# EAGLE board PCB(beta) (EAGLE 8.1.0), part 1 of 2

Size 160 x 100 mm. Coordinates in mm from the lower left corner, seen from the top.
Outline: 0,0 160,0 160,100 0,100 0,0
Copper layers (1*16): Top 0.035mm / dielectric 1.5mm / Bottom 0.035mm
Design rules "default": minimum track width 10mil, minimum drill 24mil, track to track 8mil, track to pad 8mil, pad to pad 8mil, via to via 8mil, smd to smd 8mil, copper to edge 40mil, drill to drill 8mil, minimum pad ring 10mil, minimum via ring 8mil, stop-mask expansion 4mil, vias tented up to drill 0mil, thermal gap 10mil

## Footprints (pad centres in the part's own frame; a part is rotated, then mirrored left to right if it is on the bottom)
0603 = smd 1.1 x 1: 1 -0.85,0; 2 0.85,0
0805 = smd 0.8 x 1.2: 1 -0.9,0; 2 0.9,0
EIA7343 = smd 2.55 x 2.7: A 3.17,0; C -3.17,0
NIC_10X10.5_CAP = smd 4.5 x 2.5: + 4.5,0; - -4.5,0
CPOL-RADIAL-2.5MM-6.5MM = drill 0.7 pad 1.651 square: 1 1.25,0 | drill 0.7 pad 1.651: 2 -1.25,0
NFM21C = smd 1.4 x 0.8: 1 -1.425,0; 3 1.425,0 | smd 0.6 x 1.1: 2@1 0,-0.85; 2@2 0,0.85
SMA-DIODE = smd 1.27 x 1.47: A -2.15,0; C 2.15,0
SOD-323 = smd 0.63 x 0.83: A 1.15,0; C -1.15,0
LED-0603 = smd 1 x 1: A -0.877,0; C 0.877,0
0435SERIES = smd 0.508 x 0.559: 1 -0.47,0; 2 0.47,0
4,1-PAD = drill 4.1 pad 8: B4,1 0,0
MLF32 = smd 0.7 x 0.3: 1 -2.35,1.75; 2 -2.35,1.25; 3 -2.35,0.75; 4 -2.35,0.25; 5 -2.35,-0.25; 6 -2.35,-0.75; 7 -2.35,-1.25; 8 -2.35,-1.75; 17 2.35,-1.75; 18 2.35,-1.25; 19 2.35,-0.75; 20 2.35,-0.25; 21 2.35,0.25; 22 2.35,0.75; 23 2.35,1.25; 24 2.35,1.75 | smd 0.3 x 0.7: 9 -1.75,-2.35; 10 -1.25,-2.35; 11 -0.75,-2.35; 12 -0.25,-2.35; 13 0.25,-2.35; 14 0.75,-2.35; 15 1.25,-2.35; 16 1.75,-2.35; 25 1.75,2.35; 26 1.25,2.35; 27 0.75,2.35; 28 0.25,2.35; 29 -0.25,2.35; 30 -0.75,2.35; 31 -1.25,2.35; 32 -1.75,2.35
POWER_JACK_SMD = smd 2.8 x 2.4: GND 0,-5.7; P$4 6.1,-5.7; VIN0 0,5.7; VIN1 6.1,5.7 | hole 2.032: 0,0; 4.572,0
1X03 = drill 1.016 pad 1.88: 1 0,0; 2 2.54,0; 3 5.08,0
USB-B-MICRO-SMD = smd 1.45 x 0.4: D+ 2.725,0; D- 2.725,0.65; GND 2.725,-1.3; ID 2.725,-0.65; VBUS 2.725,1.3 | smd 1.5 x 1.8: SHIELD1 0,3.685; SHIELD2 0,-3.685 | smd 1.5 x 2.5: SHIELD3 0,0 | hole 0.85: 2.2,1.9; 2.2,-1.9
2X3 = drill 1.016 pad 1.88: 1 0,0; 2 0,2.54; 3 2.54,0; 4 2.54,2.54; 5 5.08,0; 6 5.08,2.54
685119134923 = smd 0.28 x 2.6: 1 4.5,0; 2 4,0; 3 3.5,0; 4 3,0; 5 2.5,0; 6 2,0; 7 1.5,0; 8 1,0; 9 0.5,0; 10 0,0; 11 -0.5,0; 12 -1,0; 13 -1.5,0; 14 -2,0; 15 -2.5,0; 16 -3,0; 17 -3.5,0; 18 -4,0; 19 -4.5,0 | drill 0.9 pad 1.778 long: Z1 -7.25,-0.8; Z2 -7.25,-6.8; Z3 7.25,-6.8; Z4 7.25,-0.8
CON40_2X20_DU_SSM = smd 1.016 x 1.346: 1 24.13,-2.388; 2 24.13,2.388; 3 21.59,-2.388; 4 21.59,2.388; 5 19.05,-2.388; 6 19.05,2.388; 7 16.51,-2.388; 8 16.51,2.388; 9 13.97,-2.388; 10 13.97,2.388; 11 11.43,-2.388; 12 11.43,2.388; 13 8.89,-2.388; 14 8.89,2.388; 15 6.35,-2.388; 16 6.35,2.388; 17 3.81,-2.388; 18 3.81,2.388; 19 1.27,-2.388; 20 1.27,2.388; 21 -1.27,-2.388; 22 -1.27,2.388; 23 -3.81,-2.388; 24 -3.81,2.388; 25 -6.35,-2.388; 26 -6.35,2.388; 27 -8.89,-2.388; 28 -8.89,2.388; 29 -11.43,-2.388; 30 -11.43,2.388; 31 -13.97,-2.388; 32 -13.97,2.388; 33 -16.51,-2.388; 34 -16.51,2.388; 35 -19.05,-2.388; 36 -19.05,2.388; 37 -21.59,-2.388; 38 -21.59,2.388; 39 -24.13,-2.388; 40 -24.13,2.388
1X03-1MM-RA = smd 0.6 x 1.35: 1 -1,0; 2 0,0; 3 1,0 | smd 1.2 x 2: NC1 2.3,-3.675; NC2 -2.3,-3.675
DM3AT-SF-PEJM5 = smd 0.7 x 1.2: 1 3.2,-0.1; 2 2.1,-0.1; 3 1,-0.1; 4 -0.1,-0.1; 5 -1.2,-0.1; 6 -2.3,-0.1; 7 -3.4,-0.1; 8 -4.5,-0.1; B -5.45,-0.1 | smd 1 x 0.8: A -6.4,-10.6 | smd 1 x 1.2: MOUNT0 4.75,-0.1; MOUNT1 -6.4,-4.4 | smd 1 x 2.8: MOUNT2 -6.4,-14.75 | smd 1.3 x 1.9: MOUNT3 7.1,-15.2
2X3_SMD = smd 1.02 x 1.9: 1 -2.54,-2.85; 2 -2.54,2.85; 3 0,-2.85; 4 0,2.85; 5 2.54,-2.85; 6 2.54,2.85
692112030100 = smd 0.7 x 1.8: 1 -3,0; 2 -1,0; 3 1,0; 4 3,0; 5 4,0; 6 2,0; 7 0,0; 8 -2,0; 9 -4,0 | drill 1 pad 1.676 long: Z1 5.85,2.45; Z2 -5.85,2.45
TE_1-2295018-2 = smd 0.3 x 0.8: A1 -2.75,4.63; A2 -2.25,4.63; A3 -1.75,4.63; A4 -1.25,4.63; A5 -0.75,4.63; A6 -0.25,4.63; A7 0.25,4.63; A8 0.75,4.63; A9 1.25,4.63; A10 1.75,4.63; A11 2.25,4.63; A12 2.75,4.63; B1 3,3.43; B2 2.5,3.43; B3 2,3.43; B4 1.5,3.43; B5 1,3.43; B6 0.5,3.43; B7 -0.5,3.43; B8 -1,3.43; B9 -1.5,3.43; B10 -2,3.43; B11 -2.5,3.43; B12 -3,3.43 | hole 0.5: -4.55,4.695; 4.55,4.695; -5.97,0.55; -5.97,-0.55; 5.97,0.55; 5.97,-0.55 | hole 0.6: -4,3.795; 4,3.795 | hole 1: 0,0
2,54/1,0 = drill 1.016 pad 2.54 octagon: 1 0,0
SC70-6 = smd 0.3 x 0.66: 1 -0.65,-0.92; 2 0,-0.92; 3 0.65,-0.92; 4 0.65,0.92; 5 0,0.92; 6 -0.65,0.92
SOT23-3 = smd 0.8 x 0.9: 1 -0.95,-1; 2 0.95,-1; 3 0,1.1
2010 = smd 1.8 x 2.7: 1 -2.2,0; 2 2.2,0
TACTILE_SWITCH_SMD_4.6X2.8MM = smd 0.9 x 1: 1 -2.05,-0.8; 2 2.05,-0.8; 3 2.05,0.8; 4 -2.05,0.8
SOT95P280X145-6N = smd 1.27 x 0.559: 1 -1.295,0.94; 2 -1.295,0; 3 -1.295,-0.94; 4 1.295,-0.94; 5 1.295,0; 6 1.295,0.94
DSG8_0P9X1P6 = smd 0.5 x 0.28: 1 -0.95,0.5; 2 -0.95,0; 3 -0.95,-0.5; 4 0.95,-0.5; 5 0.95,0; 6 0.95,0.5 | smd 0.9 x 1.6: 7 0,0 | drill 0.254 pad 0.508: V 0,-0.406; V_1 0,0.406
RKS20_1P1X3P1 = smd 0.305 x 0.813: 1 -0.25,2.197; 10 -0.25,-2.197; 11 0.25,-2.197; 20 0.25,2.197 | smd 0.813 x 0.305: 2 -1.194,1.75; 3 -1.194,1.25; 4 -1.194,0.75; 5 -1.194,0.25; 6 -1.194,-0.25; 7 -1.194,-0.75; 8 -1.194,-1.25; 9 -1.194,-1.75; 12 1.194,-1.75; 13 1.194,-1.25; 14 1.194,-0.75; 15 1.194,-0.25; 16 1.194,0.25; 17 1.194,0.75; 18 1.194,1.25; 19 1.194,1.75 | smd 1.1 x 3.1: 21 0,0 | drill 0.508 pad 0.508: V 0,-0.787; V_1 0,0; V_2 0,0.787
TQFP32-08 = smd 1.27 x 0.559: 1 -4.293,2.8; 2 -4.293,2; 3 -4.293,1.2; 4 -4.293,0.4; 5 -4.293,-0.4; 6 -4.293,-1.2; 7 -4.293,-2; 8 -4.293,-2.8; 17 4.293,-2.8; 18 4.293,-2; 19 4.293,-1.2; 20 4.293,-0.4; 21 4.293,0.4; 22 4.293,1.2; 23 4.293,2; 24 4.293,2.8 | smd 0.559 x 1.27: 9 -2.8,-4.293; 10 -2,-4.293; 11 -1.2,-4.293; 12 -0.4,-4.293; 13 0.4,-4.293; 14 1.2,-4.293; 15 2,-4.293; 16 2.8,-4.293; 25 2.8,4.293; 26 2,4.293; 27 1.2,4.293; 28 0.4,4.293; 29 -0.4,4.293; 30 -1.2,4.293; 31 -2,4.293; 32 -2.8,4.293
RFM69HCW-XXXS2 = smd 3 x 1.2: 1 -7.5,7; 2 -7.5,5; 3 -7.5,3; 4 -7.5,1; 5 -7.5,-1; 6 -7.5,-3; 7 -7.5,-5; 8 -7.5,-7; 9 7.5,-7; 10 7.5,-5; 11 7.5,-3; 12 7.5,-1; 13 7.5,1; 14 7.5,3; 15 7.5,5; 16 7.5,7
DSJ14_2P85X1P58 = smd 0.82 x 0.28: 1 -1.51,1.5; 2 -1.51,1; 3 -1.51,0.5; 4 -1.51,0; 5 -1.51,-0.5; 6 -1.51,-1; 7 -1.51,-1.5; 8 1.51,-1.5; 9 1.51,-1; 10 1.51,-0.5; 11 1.51,0; 12 1.51,0.5; 13 1.51,1; 14 1.51,1.5 | smd 1.58 x 2.85: 15 0,0 | drill 0.254 pad 0.508: V -0.406,-0.787; V_1 -0.406,0; V_2 -0.406,0.787; V_3 0.406,-0.787; V_4 0.406,0; V_5 0.406,0.787
4-UFBGA = smd 0.22 x 0.22: A1 0.2,0.2; A2 0.2,-0.2; B1 -0.2,0.2; B2 -0.2,-0.2
20-TQFP = smd 0.3 x 0.65: P$1 0.25,2.1; P$10 0.25,-2.1; P$11 -0.25,-2.1; P$20 -0.25,2.1 | smd 0.65 x 0.3: P$2 1.1,1.75; P$3 1.1,1.25; P$4 1.1,0.75; P$5 1.1,0.25; P$6 1.1,-0.25; P$7 1.1,-0.75; P$8 1.1,-1.25; P$9 1.1,-1.75; P$12 -1.1,-1.75; P$13 -1.1,-1.25; P$14 -1.1,-0.75; P$15 -1.1,-0.25; P$16 -1.1,0.25; P$17 -1.1,0.75; P$18 -1.1,1.25; P$19 -1.1,1.75 | smd 0.9 x 2.9: P$21 0,0
0302_(0806_METRIC) = smd 0.09 x 0.075 rotated 135: P1_1 -0.253,0.292 | smd 0.2 x 0.14: P1_2 -0.295,0.22; P2_3 -0.295,-0.22; P3_3 0.295,-0.22; P4_3 0.295,0.22 | smd 0.19 x 0.2: P1_3 -0.355,0.25; P2_2 -0.355,-0.25; P3_2 0.355,-0.25; P4_2 0.355,0.25 | smd 0.09 x 0.075 rotated 225: P2_1 -0.253,-0.292 | smd 0.09 x 0.075 rotated 315: P3_1 0.253,-0.292 | smd 0.09 x 0.075 rotated 45: P4_1 0.253,0.292 | smd 0.15 x 0.17: P5_1 0,0.465; P6_2 0,-0.465 | smd 0.105 x 0.105 rotated 135: P5_2 0,0.38 | smd 0.105 x 0.105 rotated 315: P6_1 0,-0.375
4X-.145X.05_SQ = smd 1.27 x 3.683: P$1 -1.206,2.477; P$2 1.27,2.477; P$3 -1.27,-2.477; P$4 1.27,-2.477
SOIC8 = smd 0.6 x 1.5: 1 -1.905,-2.75; 2 -0.635,-2.75; 3 0.635,-2.75; 4 1.905,-2.75; 5 1.905,2.75; 6 0.635,2.75; 7 -0.635,2.75; 8 -1.905,2.75
16-WLCSP = smd 0.2 x 0.2: A1 -0.6,0.6; A2 -0.2,0.6; A3 0.2,0.6; A4 0.6,0.6; B1 -0.6,0.2; B2 -0.2,0.2; B3 0.2,0.2; B4 0.6,0.2; C1 -0.6,-0.2; C2 -0.2,-0.2; C3 0.2,-0.2; C4 0.6,-0.2; D1 -0.6,-0.6; D2 -0.2,-0.6; D3 0.2,-0.6; D4 0.6,-0.6
9-WLCSP = smd 0.2 x 0.2: A1 -0.4,0.4; A2 0,0.4; A3 0.4,0.4; B1 -0.4,0; B2 0,0; B3 0.4,0; C1 -0.4,-0.4; C2 0,-0.4; C3 0.4,-0.4
IND_SPM4020 = smd 1.65 x 2.3: 1 -1.65,0; 2 1.65,0
5-WLCSP = smd 0.22 x 0.22: A1 -0.2,0.4; A2 0.2,0.4; B1 -0.2,0; B2 0.2,0; GND 0.2,-0.4
25-WLCSP = smd 0.25 x 0.25: A1 -0.8,0.8; A2 -0.4,0.8; A3 0,0.8; A4 0.4,0.8; A5 0.8,0.8; B1 -0.8,0.4; B2 -0.4,0.4; B3 0,0.4; B4 0.4,0.4; B5 0.8,0.4; C1 -0.8,0; C2 -0.4,0; C3 0,0; C4 0.4,0; C5 0.8,0; D1 -0.8,-0.4; D2 -0.4,-0.4; D3 0,-0.4; D4 0.4,-0.4; D5 0.8,-0.4; E1 -0.8,-0.8; E2 -0.4,-0.8; E3 0,-0.8; E4 0.4,-0.8; E5 0.8,-0.8
3-XFDFN = smd 0.5 x 0.25: P$1 0,-0.325 | smd 0.15 x 0.275: P$2 -0.175,0.325; P$3 0.175,0.325
0402 = smd 0.7 x 0.9: 1 -0.65,0; 2 0.65,0
12MM_COINCELL = smd 2.5 x 5.1: P$1 7.65,0; P$2 -7.65,0 | smd 10.2 x 10.2: P$3 0,0
1/8"RING = drill 1.714 pad 3.175: P$1 0,0
ASPIAIG-S8050 = smd 2.2 x 7.5: 1 -72.39,-10.16; 2 -66.04,-10.16
WQFN-24 = smd 0.8 x 0.25: 1 -2,1.25; 2 -2,0.75; 3 -2,0.25; 4 -2,-0.25; 5 -2,-0.75; 6 -2,-1.25; 13 2,-1.25; 14 2,-0.75; 15 2,-0.25; 16 2,0.25; 17 2,0.75; 18 2,1.25 | smd 0.25 x 0.8: 7 -1.25,-2; 8 -0.75,-2; 9 -0.25,-2; 10 0.25,-2; 11 0.75,-2; 12 1.25,-2; 19 1.25,2; 20 0.75,2; 21 0.25,2; 22 -0.25,2; 23 -0.75,2; 24 -1.25,2 | smd 2.6 x 2.6: EP 0,0
TQFN32 = smd 0.965 x 0.366: 1 -3.378,2.275; 2 -3.378,1.625; 3 -3.378,0.975; 4 -3.378,0.325; 5 -3.378,-0.325; 6 -3.378,-0.975; 7 -3.378,-1.625; 8 -3.378,-2.275; 17 3.378,-2.275; 18 3.378,-1.625; 19 3.378,-0.975; 20 3.378,-0.325; 21 3.378,0.325; 22 3.378,0.975; 23 3.378,1.625; 24 3.378,2.275 | smd 0.366 x 0.965: 9 -2.275,-3.378; 10 -1.625,-3.378; 11 -0.975,-3.378; 12 -0.325,-3.378; 13 0.325,-3.378; 14 0.975,-3.378; 15 1.625,-3.378; 16 2.275,-3.378; 25 2.275,3.378; 26 1.625,3.378; 27 0.975,3.378; 28 0.325,3.378; 29 -0.325,3.378; 30 -0.975,3.378; 31 -1.625,3.378; 32 -2.275,3.378 | smd 4.851 x 4.851: EXP 0,0
100-DF40 = smd 0.2 x 1.14: P$1 -9.8,-1.32; P$2 -9.8,1.32; P$3 -9.4,-1.32; P$4 -9.4,1.32; P$5 -9,-1.32; P$6 -9,1.32; P$7 -8.6,-1.32; P$8 -8.6,1.32; P$9 -8.2,-1.32; P$10 -8.2,1.32; P$11 -7.8,-1.32; P$12 -7.8,1.32; P$13 -7.4,-1.32; P$14 -7.4,1.32; P$15 -7,-1.32; P$16 -7,1.32; P$17 -6.6,-1.32; P$18 -6.6,1.32; P$19 -6.2,-1.32; P$20 -6.2,1.32; P$21 -5.8,-1.32; P$22 -5.8,1.32; P$23 -5.4,-1.32; P$24 -5.4,1.32; P$25 -5,-1.32; P$26 -5,1.32; P$27 -4.6,-1.32; P$28 -4.6,1.32; P$29 -4.2,-1.32; P$30 -4.2,1.32; P$31 -3.8,-1.32; P$32 -3.8,1.32; P$33 -3.4,-1.32; P$34 -3.4,1.32; P$35 -3,-1.32; P$36 -3,1.32; P$37 -2.6,-1.32; P$38 -2.6,1.32; P$39 -2.2,-1.32; P$40 -2.2,1.32; P$41 -1.8,-1.32; P$42 -1.8,1.32; P$43 -1.4,-1.32; P$44 -1.4,1.32; P$45 -1,-1.32; P$46 -1,1.32; P$47 -0.6,-1.32; P$48 -0.6,1.32; P$49 -0.2,-1.32; P$50 -0.2,1.32; P$51 0.2,-1.32; P$52 0.2,1.32; P$53 0.6,-1.32; P$54 0.6,1.32; P$55 1,-1.32; P$56 1,1.32; P$57 1.4,-1.32; P$58 1.4,1.32; P$59 1.8,-1.32; P$60 1.8,1.32; P$61 2.2,-1.32; P$62 2.2,1.32; P$63 2.6,-1.32; P$64 2.6,1.32; P$65 3,-1.32; P$66 3,1.32; P$67 3.4,-1.32; P$68 3.4,1.32; P$69 3.8,-1.32; P$70 3.8,1.32; P$71 4.2,-1.32; P$72 4.2,1.32; P$73 4.6,-1.32; P$74 4.6,1.32; P$75 5,-1.32; P$76 5,1.32; P$77 5.4,-1.32; P$78 5.4,1.32; P$79 5.8,-1.32; P$80 5.8,1.32; P$81 6.2,-1.32; P$82 6.2,1.32; P$83 6.6,-1.32; P$84 6.6,1.32; P$85 7,-1.32; P$86 7,1.32; P$87 7.4,-1.32; P$88 7.4,1.32; P$89 7.8,-1.32; P$90 7.8,1.32; P$91 8.2,-1.32; P$92 8.2,1.32; P$93 8.6,-1.32; P$94 8.6,1.32; P$95 9,-1.32; P$96 9,1.32; P$97 9.4,-1.32; P$98 9.4,1.32; P$99 9.8,-1.32; P$100 9.8,1.32
QFN64-9X9 = smd 0.55 x 0.25: 1 -4.35,3.75; 2 -4.35,3.25; 3 -4.35,2.75; 4 -4.35,2.25; 5 -4.35,1.75; 6 -4.35,1.25; 7 -4.35,0.75; 8 -4.35,0.25; 9 -4.35,-0.25; 10 -4.35,-0.75; 11 -4.35,-1.25; 12 -4.35,-1.75; 13 -4.35,-2.25; 14 -4.35,-2.75; 15 -4.35,-3.25; 16 -4.35,-3.75; 33 4.35,-3.75; 34 4.35,-3.25; 35 4.35,-2.75; 36 4.35,-2.25; 37 4.35,-1.75; 38 4.35,-1.25; 39 4.35,-0.75; 40 4.35,-0.25; 41 4.35,0.25; 42 4.35,0.75; 43 4.35,1.25; 44 4.35,1.75; 45 4.35,2.25; 46 4.35,2.75; 47 4.35,3.25; 48 4.35,3.75 | smd 0.25 x 0.55: 17 -3.75,-4.35; 18 -3.25,-4.35; 19 -2.75,-4.35; 20 -2.25,-4.35; 21 -1.75,-4.35; 22 -1.25,-4.35; 23 -0.75,-4.35; 24 -0.25,-4.35; 25 0.25,-4.35; 26 0.75,-4.35; 27 1.25,-4.35; 28 1.75,-4.35; 29 2.25,-4.35; 30 2.75,-4.35; 31 3.25,-4.35; 32 3.75,-4.35; 49 3.75,4.35; 50 3.25,4.35; 51 2.75,4.35; 52 2.25,4.35; 53 1.75,4.35; 54 1.25,4.35; 55 0.75,4.35; 56 0.25,4.35; 57 -0.25,4.35; 58 -0.75,4.35; 59 -1.25,4.35; 60 -1.75,4.35; 61 -2.25,4.35; 62 -2.75,4.35; 63 -3.25,4.35; 64 -3.75,4.35 | smd 7.1 x 7.1: EXP 0,0
10-VSON = smd 0.28 x 0.71: 1_1 1,1.545; 2_1 0.5,1.545; 3_1 0,1.545; 4_1 -0.5,1.545; 5_1 -1,1.545; 6_1 -1,-1.545; 7_1 -0.5,-1.545; 8_1 0,-1.545; 9_1 0.5,-1.545; 10_1 1,-1.545 | smd 0.28 x 0.28: 1_2 1,1.2; 2_2 0.5,1.2; 3_2 0,1.2; 4_2 -0.5,1.2; 5_2 -1,1.2; 6_2 -1,-1.2; 7_2 -0.5,-1.2; 8_2 0,-1.2; 9_2 0.5,-1.2; 10_2 1,-1.2 | smd 3.8 x 0.28: PAD1 0,0.25; PAD2 0,-0.25 | smd 2.4 x 1.65: PAD3 0,0
CRYSTAL-SMD-5X3.2-4PAD = smd 1.9 x 1.1: 1 -1.85,-1.15; 2 1.85,-1.15; 3 1.85,1.15; 4 -1.85,1.15

## Placement (x,y rotation side)
C1  0.1uF  [0603]  -19.05,115.57 0 top  (outside the outline)
C2  0.1uF  [0603]  -22.86,115.57 0 top  (outside the outline)
C3  0.1uF  [0603]  -26.67,115.57 0 top  (outside the outline)
C4  22uF  [0805]  -31.75,106.68 0 top  (outside the outline)
C5  47pF  [0603]  -30.48,115.57 0 top  (outside the outline)
C6  100uF  [EIA7343]  -24.13,95.25 0 top  (outside the outline)
C7  0.1uF  [0603]  -34.29,115.57 0 top  (outside the outline)
C8  10uF  [0603]  -38.1,115.57 0 top  (outside the outline)
C9  10uF  [0603]  -41.91,115.57 0 top  (outside the outline)
C10  10uF  [0603]  -45.72,115.57 0 top  (outside the outline)
C11  1.0uF  [0603]  -49.53,115.57 0 top  (outside the outline)
C12  0.1uF  [0603]  -53.34,115.57 0 top  (outside the outline)
C13  22uF  [0805]  -35.56,106.68 0 top  (outside the outline)
C14  22uF  [0805]  -39.37,106.68 0 top  (outside the outline)
C15  22uF  [0805]  -43.18,106.68 0 top  (outside the outline)
C16  2.2uF  [0603]  -57.15,115.57 0 top  (outside the outline)
C17  10uF  [0603]  -60.96,115.57 0 top  (outside the outline)
C18  1.0uF  [0603]  -64.77,115.57 0 top  (outside the outline)
C19  1.0uF  [0603]  -68.58,115.57 0 top  (outside the outline)
C20  1.0uF  [0603]  -72.39,115.57 0 top  (outside the outline)
C21  22uF  [0805]  -46.99,106.68 0 top  (outside the outline)
C22  220PF  [0603]  -76.2,115.57 0 top  (outside the outline)
C23  10uF  [0603]  -80.01,115.57 0 top  (outside the outline)
C24  0.1uF  [0603]  -83.82,115.57 0 top  (outside the outline)
C25  0.1uF  [0603]  -87.63,115.57 0 top  (outside the outline)
C26  0.1uF  [0603]  -91.44,115.57 0 top  (outside the outline)
C27  0.1uF  [0603]  -95.25,115.57 0 top  (outside the outline)
C28  0.1uF  [0603]  -99.06,115.57 0 top  (outside the outline)
C29  0.1uF  [0603]  -102.87,115.57 0 top  (outside the outline)
C30  0.1uF  [0603]  -106.68,115.57 0 top  (outside the outline)
C31  0.1uF  [0603]  -110.49,115.57 0 top  (outside the outline)
C32  0.1uF  [0603]  -114.3,115.57 0 top  (outside the outline)
C33  0.1uF  [0603]  -118.11,115.57 0 top  (outside the outline)
C34  0.1uF  [0603]  -121.92,115.57 0 top  (outside the outline)
C35  0.1uF  [0603]  -125.73,115.57 0 top  (outside the outline)
C36  0.1uF  [0603]  -129.54,115.57 0 top  (outside the outline)
C37  0.1uF  [0603]  -133.35,115.57 0 top  (outside the outline)
C38  0.1uF  [0603]  -137.16,115.57 0 top  (outside the outline)
C39  0.1uF  [0603]  -140.97,115.57 0 top  (outside the outline)
C40  0.1uF  [0603]  -144.78,115.57 0 top  (outside the outline)
C41  0.22uF  [0603]  -143.51,111.76 0 top  (outside the outline)
C42  0.22uF  [0603]  -15.24,115.57 0 top  (outside the outline)
C43  0.1uF  [0603]  -15.24,119.38 0 top  (outside the outline)
C44  0.1uF  [0603]  -19.05,119.38 0 top  (outside the outline)
C45  0.1uF  [0603]  -22.86,119.38 0 top  (outside the outline)
C46  0.1uF  [0603]  -26.67,119.38 0 top  (outside the outline)
C47  0.1uF  [0603]  -30.48,119.38 0 top  (outside the outline)
C48  0.1uF  [0603]  -34.29,119.38 0 top  (outside the outline)
C49  0.1uF  [0603]  -38.1,119.38 0 top  (outside the outline)
C50  0.1uF  [0603]  -41.91,119.38 0 top  (outside the outline)
C51  0.1uF  [0603]  -45.72,119.38 0 top  (outside the outline)
C52  0.1uF  [0603]  -49.53,119.38 0 top  (outside the outline)
C53  0.1uF  [0603]  -53.34,119.38 0 top  (outside the outline)
C54  0.1uF  [0603]  -57.15,119.38 0 top  (outside the outline)
C55  0.1uF  [0603]  -60.96,119.38 0 top  (outside the outline)
C56  0.1uF  [0603]  -64.77,119.38 0 top  (outside the outline)
C57  0.1uF  [0603]  -68.58,119.38 0 top  (outside the outline)
C58  0.1uF  [0603]  -72.39,119.38 0 top  (outside the outline)
C59  0.1uF  [0603]  -76.2,119.38 0 top  (outside the outline)
C60  0.1uF  [0603]  -80.01,119.38 0 top  (outside the outline)
C61  0.1uF  [0603]  -83.82,119.38 0 top  (outside the outline)
C62  0.1uF  [0603]  -87.63,119.38 0 top  (outside the outline)
C63  0.1uF  [0603]  -91.44,119.38 0 top  (outside the outline)
C64  0.1uF  [0603]  -95.25,119.38 0 top  (outside the outline)
C65  0.1uF  [0603]  -99.06,119.38 0 top  (outside the outline)
C66  0.1uF  [0603]  -102.87,119.38 0 top  (outside the outline)
C67  0.1uF  [0603]  -106.68,119.38 0 top  (outside the outline)
C68  0.1uF  [0603]  -110.49,119.38 0 top  (outside the outline)
C69  0.1uF  [0603]  -114.3,119.38 0 top  (outside the outline)
C70  0.1uF  [0603]  -118.11,119.38 0 top  (outside the outline)
C71  0.1uF  [0603]  -121.92,119.38 0 top  (outside the outline)
C72  10uF  [0603]  -125.73,119.38 0 top  (outside the outline)
C73  2.2uF  [0603]  -129.54,119.38 0 top  (outside the outline)
C74  2.2uF  [0603]  -133.35,119.38 0 top  (outside the outline)
C75  100uF  [NIC_10X10.5_CAP]  -76.2,50.8 0 top  (outside the outline)
C76  10uF  [0603]  -137.16,119.38 0 top  (outside the outline)
C77  100pF  [0603]  -140.97,119.38 0 top  (outside the outline)
C78  22uF  [0805]  -50.8,106.68 0 top  (outside the outline)
C79  22uF  [0805]  -54.61,106.68 0 top  (outside the outline)
C80  22uF  [0805]  -58.42,106.68 0 top  (outside the outline)
C82  47pF  [0603]  -15.24,123.19 0 top  (outside the outline)
C83  1.0uF  [0603]  -19.05,123.19 0 top  (outside the outline)
C84  220pF  [0603]  -22.86,123.19 0 top  (outside the outline)
C85  220pF  [0603]  -26.67,123.19 0 top  (outside the outline)
C86  0.1uF  [0603]  -30.48,123.19 0 top  (outside the outline)
C87  0.1uF  [0603]  -34.29,123.19 0 top  (outside the outline)
C88  0.1uF  [0603]  -38.1,123.19 0 top  (outside the outline)
C89  10uF  [0603]  -41.91,123.19 0 top  (outside the outline)
C90  0.1uF  [0603]  -45.72,123.19 0 top  (outside the outline)
C91  0.1uF  [0603]  -49.53,123.19 0 top  (outside the outline)
C92  10uF  [0603]  -53.34,123.19 0 top  (outside the outline)
C93  10uF  [0603]  -57.15,123.19 0 top  (outside the outline)
C94  10uF  [0603]  -60.96,123.19 0 top  (outside the outline)
C95  47nF  [0603]  -64.77,123.19 0 top  (outside the outline)
C96  4.7uF  [0603]  -68.58,123.19 0 top  (outside the outline)
C97  22uF  [0805]  -62.23,106.68 0 top  (outside the outline)
C98  22uF  [0805]  -66.04,106.68 0 top  (outside the outline)
C99  10uF  [0603]  -72.39,123.19 0 top  (outside the outline)
C100  0.1uF  [0603]  -76.2,123.19 0 top  (outside the outline)
C101  0.1uF  [0603]  -80.01,123.19 0 top  (outside the outline)
C102  0.1uF  [0603]  -83.82,123.19 0 top  (outside the outline)
C103  1.0uF  [0603]  -87.63,123.19 0 top  (outside the outline)
C104  1.0uF  [0603]  -91.44,123.19 0 top  (outside the outline)
C105  10uF  [0603]  -95.25,123.19 0 top  (outside the outline)
C106  10uF  [0603]  -99.06,123.19 0 top  (outside the outline)
C107  10uF  [0603]  -102.87,123.19 0 top  (outside the outline)
C108  10uF  [0603]  -106.68,123.19 0 top  (outside the outline)
C109  0.1uF  [0603]  -110.49,123.19 0 top  (outside the outline)
C110  0.1uF  [0603]  -114.3,123.19 0 top  (outside the outline)
C111  0.1uF  [0603]  -118.11,123.19 0 top  (outside the outline)
C112  0.1uF  [0603]  -121.92,123.19 0 top  (outside the outline)
C113  0.1uF  [0603]  -125.73,123.19 0 top  (outside the outline)
C114  0.1uF  [0603]  -129.54,123.19 0 top  (outside the outline)
C115  0.1uF  [0603]  -133.35,123.19 0 top  (outside the outline)
C116  0.1uF  [0603]  -137.16,123.19 0 top  (outside the outline)
C117  0.1uF  [0603]  -140.97,123.19 0 top  (outside the outline)
C118  0.1uF  [0603]  -144.78,123.19 0 top  (outside the outline)
C119  0.1uF  [0603]  -15.24,127 0 top  (outside the outline)
C120  0.1uF  [0603]  -19.05,127 0 top  (outside the outline)
C121  0.1uF  [0603]  -22.86,127 0 top  (outside the outline)
C122  0.1uF  [0603]  -26.67,127 0 top  (outside the outline)
C123  0.1uF  [0603]  -30.48,127 0 top  (outside the outline)
C124  0.1uF  [0603]  -34.29,127 0 top  (outside the outline)
C125  0.1uF  [0603]  -38.1,127 0 top  (outside the outline)
C126  0.1uF  [0603]  -41.91,127 0 top  (outside the outline)
C127  0.1uF  [0603]  -45.72,127 0 top  (outside the outline)
C128  10uF  [0603]  -49.53,127 0 top  (outside the outline)
C129  10uF  [0603]  -53.34,127 0 top  (outside the outline)
C130  22pF  [0603]  -57.15,127 0 top  (outside the outline)
C131  22pF  [0603]  -60.96,127 0 top  (outside the outline)
C132  0.1uF  [0603]  -64.77,127 0 top  (outside the outline)
C133  0.1uF  [0603]  -68.58,127 0 top  (outside the outline)
C134  18pF  [0603]  -72.39,127 0 top  (outside the outline)
C135  18pF  [0603]  -76.2,127 0 top  (outside the outline)
C136  1.0uF  [0603]  -80.01,127 0 top  (outside the outline)
C137  0.1uF  [0603]  -83.82,127 0 top  (outside the outline)
C138  0.1uF  [0603]  -87.63,127 0 top  (outside the outline)
C139  10uF  [0603]  -91.44,127 0 top  (outside the outline)
C140  0.1uF  [0603]  -95.25,127 0 top  (outside the outline)
C141  0.1uF  [0603]  -99.06,127 0 top  (outside the outline)
C142  0.1uF  [0603]  -102.87,127 0 top  (outside the outline)
C143  0.1uF  [0603]  -106.68,127 0 top  (outside the outline)
C144  0.1uF  [0603]  -110.49,127 0 top  (outside the outline)
C145  0.1uF  [0603]  -114.3,127 0 top  (outside the outline)
C146  0.1uF  [0603]  -118.11,127 0 top  (outside the outline)
C147  0.1uF  [0603]  -121.92,127 0 top  (outside the outline)
C148  0.1uF  [0603]  -125.73,127 0 top  (outside the outline)
C149  0.1uF  [0603]  -129.54,127 0 top  (outside the outline)
C150  0.1uF  [0603]  -133.35,127 0 top  (outside the outline)
C151  0.1uF  [0603]  -137.16,127 0 top  (outside the outline)
C152  0.1uF  [0603]  -140.97,127 0 top  (outside the outline)
C153  0.1uF  [0603]  -144.78,127 0 top  (outside the outline)
C154  0.1uF  [0603]  -15.24,130.81 0 top  (outside the outline)
C155  10uF  [0603]  -19.05,130.81 0 top  (outside the outline)
C156  10uF  [0603]  -22.86,130.81 0 top  (outside the outline)
C157  0.1uF  [0603]  -26.67,130.81 0 top  (outside the outline)
C158  0.1uF  [0603]  -30.48,130.81 0 top  (outside the outline)
C159  0.1uF  [0603]  -34.29,130.81 0 top  (outside the outline)
C160  0.1uF  [0603]  -38.1,130.81 0 top  (outside the outline)
C161  0.1uF  [0603]  -41.91,130.81 0 top  (outside the outline)
C162  0.1uF  [0603]  -45.72,130.81 0 top  (outside the outline)
C163  0.1uF  [0603]  -49.53,130.81 0 top  (outside the outline)
C164  0.1uF  [0603]  -53.34,130.81 0 top  (outside the outline)
C165  1nF  [0603]  -57.15,130.81 0 top  (outside the outline)
C166  1nF  [0603]  -60.96,130.81 0 top  (outside the outline)
C167  1nF  [0603]  -64.77,130.81 0 top  (outside the outline)
C168  1nF  [0603]  -68.58,130.81 0 top  (outside the outline)
C169  0.1uF  [0603]  -72.39,130.81 0 top  (outside the outline)
C170  0.1uF  [0603]  -76.2,130.81 0 top  (outside the outline)
C171  0.1uF  [0603]  -80.01,130.81 0 top  (outside the outline)
C172  0.1uF  [0603]  -83.82,130.81 0 top  (outside the outline)
C173  4.7uF  [0603]  -87.63,130.81 0 top  (outside the outline)
C174  10nF  [0603]  -91.44,130.81 0 top  (outside the outline)
C175  4.7uF  [0603]  -95.25,130.81 0 top  (outside the outline)
C176  0.1uF  [0603]  -99.06,130.81 0 top  (outside the outline)
C177  0.1uF  [0603]  -102.87,130.81 0 top  (outside the outline)
C178  150uF  [CPOL-RADIAL-2.5MM-6.5MM]  -30.48,76.2 0 top  (outside the outline)
C179  150uF  [CPOL-RADIAL-2.5MM-6.5MM]  -38.1,76.2 0 top  (outside the outline)
C180  0.1uF  [0603]  -106.68,130.81 0 top  (outside the outline)
C181  0.1uF  [0603]  -110.49,130.81 0 top  (outside the outline)
C182  0.1uF  [0603]  -114.3,130.81 0 top  (outside the outline)
C183  150uF  [CPOL-RADIAL-2.5MM-6.5MM]  -45.72,76.2 0 top  (outside the outline)
C184  0.1uF  [0603]  -118.11,130.81 0 top  (outside the outline)
C185  150uF  [CPOL-RADIAL-2.5MM-6.5MM]  -53.34,76.2 0 top  (outside the outline)
C186  0.1uF  [0603]  -121.92,130.81 0 top  (outside the outline)
CF1  NFM18PC104R1E3D  [NFM21C]  -45.72,95.25 0 top  (outside the outline)
D1  5A/20V/550mV  [SMA-DIODE]  -132.08,93.98 0 top  (outside the outline)
D2  200mA/30V  [SMA-DIODE]  -46.99,101.6 0 top  (outside the outline)
D3  200mA/30V  [SMA-DIODE]  -53.34,101.6 0 top  (outside the outline)
D4  0.5A/40V/420mV  [SOD-323]  -55.88,111.76 0 top  (outside the outline)
D5  0.5A/40V/420mV  [SOD-323]  -64.77,111.76 0 top  (outside the outline)
D6  0.5A/40V/420mV  [SOD-323]  -73.66,111.76 0 top  (outside the outline)
D7  GREEN  [LED-0603]  -139.7,146.05 0 top  (outside the outline)
D8  GREEN  [LED-0603]  -143.51,146.05 0 top  (outside the outline)
D9  GREEN  [LED-0603]  -15.24,149.86 0 top  (outside the outline)
D10  GREEN  [LED-0603]  -19.05,149.86 0 top  (outside the outline)
D11  [LED-0603]  -31.75,149.86 0 top  (outside the outline)
F1  043503.5KRHF  [0435SERIES]  -49.53,149.86 0 top  (outside the outline)
F2  043503.5KRHF  [0435SERIES]  -54.61,149.86 0 top  (outside the outline)
FB1  120Ω/1.3A  [0603]  -113.03,111.76 0 top  (outside the outline)
FB2  120Ω/1.3A  [0603]  -119.38,111.76 0 top  (outside the outline)
FB3  120Ω/1.3A  [0603]  -125.73,111.76 0 top  (outside the outline)
FB4  120Ω/1.3A  [0603]  -132.08,111.76 0 top  (outside the outline)
FB5  120Ω/1.3A  [0603]  -138.43,111.76 0 top  (outside the outline)
FB6  220@100MHz  [0603]  -81.28,111.76 0 top  (outside the outline)
FB7  220@100MHz  [0603]  -87.63,111.76 0 top  (outside the outline)
FB8  220@100MHz  [0603]  -93.98,111.76 0 top  (outside the outline)
FB9  220@100MHz  [0603]  -100.33,111.76 0 top  (outside the outline)
FB10  220@100Mhz  [0603]  -106.68,111.76 0 top  (outside the outline)
H1  MOUNT-PAD-ROUND4.1  [4,1-PAD]  -90.17,50.8 0 top  (outside the outline)
H2  MOUNT-PAD-ROUND4.1  [4,1-PAD]  -102.87,50.8 0 top  (outside the outline)
H3  MOUNT-PAD-ROUND4.1  [4,1-PAD]  -115.57,50.8 0 top  (outside the outline)
H4  MOUNT-PAD-ROUND4.1  [4,1-PAD]  -128.27,50.8 0 top  (outside the outline)
IC1  FT232RQ  [MLF32]  -121.92,64.77 0 top  (outside the outline)
J1  5.5x2.1mm Barrel  [POWER_JACK_SMD]  -43.18,52.07 0 top  (outside the outline)
J2  [1X03]  -20.32,106.68 0 top  (outside the outline)
J3  [USB-B-MICRO-SMD]  -38.1,64.77 0 top  (outside the outline)
J4  FEMALE 2x3  [2X3]  -83.82,85.09 0 top  (outside the outline)
J5  [685119134923]  -21.59,54.61 0 top  (outside the outline)
J6  SSM-120-S-DV  [CON40_2X20_DU_SSM]  -82.55,77.47 0 top  (outside the outline)
J7  SSM-120-S-DV  [CON40_2X20_DU_SSM]  -39.37,87.63 0 top  (outside the outline)
J8  [1X03-1MM-RA]  -100.33,96.52 0 top  (outside the outline)
J9  DM3AT-SF-PEJM5  [DM3AT-SF-PEJM5]  -24.13,41.91 0 top  (outside the outline)
J10  [2X3_SMD]  -17.78,76.2 0 top  (outside the outline)
K2  692112030100  [692112030100]  -33.02,3.81 0 top  (outside the outline)
K3  692112030100  [692112030100]  -59.69,3.81 0 top  (outside the outline)
K4  692112030100  [692112030100]  -86.36,3.81 0 top  (outside the outline)
K5  692112030100  [692112030100]  -113.03,3.81 0 top  (outside the outline)
P1  1-2295018-2  [TE_1-2295018-2]  -52.07,63.5 0 top  (outside the outline)
PAD1  [2,54/1,0]  -60.96,100.33 0 top  (outside the outline)
PAD2  [2,54/1,0]  -67.31,100.33 0 top  (outside the outline)
PAD3  [2,54/1,0]  -73.66,100.33 0 top  (outside the outline)
PAD4  [2,54/1,0]  -80.01,100.33 0 top  (outside the outline)
Q1  [SC70-6]  -24.13,106.68 0 top  (outside the outline)
Q2  [SC70-6]  -27.94,106.68 0 top  (outside the outline)
Q3  220mA/50V/3.5Ω  [SOT23-3]  -68.58,86.36 0 top  (outside the outline)
Q4  220mA/50V/3.5Ω  [SOT23-3]  -73.66,86.36 0 top  (outside the outline)
R1  0  [0603]  -125.73,130.81 0 top  (outside the outline)
R2  18.2k  [0603]  -129.54,130.81 0 top  (outside the outline)
R3  10k  [0603]  -133.35,130.81 0 top  (outside the outline)
R4  0  [0603]  -137.16,130.81 0 top  (outside the outline)
R5  0  [0603]  -140.97,130.81 0 top  (outside the outline)
R6  100k  [0603]  -144.78,130.81 0 top  (outside the outline)
R7  100k  [0603]  -15.24,134.62 0 top  (outside the outline)
R8  36.5k  [0603]  -19.05,134.62 0 top  (outside the outline)
R9  110k  [0603]  -22.86,134.62 0 top  (outside the outline)
R10  0  [0603]  -26.67,134.62 0 top  (outside the outline)
R11  100k  [0603]  -30.48,134.62 0 top  (outside the outline)
R12  10k  [0603]  -34.29,134.62 0 top  (outside the outline)
R13  10k  [0603]  -38.1,134.62 0 top  (outside the outline)
R14  10k  [0603]  -41.91,134.62 0 top  (outside the outline)
R15  10k  [0603]  -45.72,134.62 0 top  (outside the outline)
R16  200k  [0603]  -49.53,134.62 0 top  (outside the outline)
R17  10k  [0603]  -53.34,134.62 0 top  (outside the outline)
R18  0  [0603]  -57.15,134.62 0 top  (outside the outline)
R19  0  [0603]  -60.96,134.62 0 top  (outside the outline)
R20  100k  [0603]  -64.77,134.62 0 top  (outside the outline)
R21  0  [0603]  -68.58,134.62 0 top  (outside the outline)
R22  2.7k  [0603]  -72.39,134.62 0 top  (outside the outline)
R23  2.7k  [0603]  -76.2,134.62 0 top  (outside the outline)
R24  200k  [0603]  -80.01,134.62 0 top  (outside the outline)
R25  100k  [0603]  -83.82,134.62 0 top  (outside the outline)
R26  100k  [0603]  -87.63,134.62 0 top  (outside the outline)
R27  100k  [0603]  -91.44,134.62 0 top  (outside the outline)
R28  100k  [0603]  -95.25,134.62 0 top  (outside the outline)
R29  200k  [0603]  -99.06,134.62 0 top  (outside the outline)
R30  200k  [0603]  -102.87,134.62 0 top  (outside the outline)
R31  100k  [0603]  -106.68,134.62 0 top  (outside the outline)
R32  100k  [0603]  -110.49,134.62 0 top  (outside the outline)
R33  100k  [0603]  -114.3,134.62 0 top  (outside the outline)
R34  100k  [0603]  -118.11,134.62 0 top  (outside the outline)
R35  100k  [0603]  -121.92,134.62 0 top  (outside the outline)
R36  100k  [0603]  -125.73,134.62 0 top  (outside the outline)
R37  100k  [0603]  -129.54,134.62 0 top  (outside the outline)
R38  100k  [0603]  -133.35,134.62 0 top  (outside the outline)
R39  200k  [0603]  -137.16,134.62 0 top  (outside the outline)
R40  1.1k  [0603]  -140.97,134.62 0 top  (outside the outline)
R41  1.1k  [0603]  -144.78,134.62 0 top  (outside the outline)
R42  1.1k  [0603]  -15.24,138.43 0 top  (outside the outline)
R43  1.1k  [0603]  -19.05,138.43 0 top  (outside the outline)
R44  560  [2010]  -139.7,93.98 0 top  (outside the outline)
R45  560  [2010]  -16.51,101.6 0 top  (outside the outline)
R46  560  [2010]  -24.13,101.6 0 top  (outside the outline)
R47  560  [2010]  -31.75,101.6 0 top  (outside the outline)
R48  100k  [0603]  -22.86,138.43 0 top  (outside the outline)
R49  100k  [0603]  -26.67,138.43 0 top  (outside the outline)
R50  100k  [0603]  -30.48,138.43 0 top  (outside the outline)
R51  100k  [0603]  -34.29,138.43 0 top  (outside the outline)
R52  100k  [0603]  -38.1,138.43 0 top  (outside the outline)
R53  100k  [0603]  -41.91,138.43 0 top  (outside the outline)
R54  200k  [0603]  -45.72,138.43 0 top  (outside the outline)
R55  200k  [0603]  -49.53,138.43 0 top  (outside the outline)
R56  200k  [0603]  -53.34,138.43 0 top  (outside the outline)
R57  200k  [0603]  -57.15,138.43 0 top  (outside the outline)
R58  100k  [0603]  -60.96,138.43 0 top  (outside the outline)
R59  100k  [0603]  -64.77,138.43 0 top  (outside the outline)
R60  100k  [0603]  -68.58,138.43 0 top  (outside the outline)
R61  100  [0603]  -72.39,138.43 0 top  (outside the outline)
R62  3.3k  [0603]  -76.2,138.43 0 top  (outside the outline)
R63  3.3k  [0603]  -80.01,138.43 0 top  (outside the outline)
R64  10k  [0603]  -83.82,138.43 0 top  (outside the outline)
R65  10k  [0603]  -87.63,138.43 0 top  (outside the outline)
R66  10k  [0603]  -91.44,138.43 0 top  (outside the outline)
R67  10k  [0603]  -95.25,138.43 0 top  (outside the outline)
R68  0  [0603]  -99.06,138.43 0 top  (outside the outline)
R69  0  [0603]  -102.87,138.43 0 top  (outside the outline)
R70  0  [0603]  -106.68,138.43 0 top  (outside the outline)
R71  0  [0603]  -110.49,138.43 0 top  (outside the outline)
R72  0  [0603]  -114.3,138.43 0 top  (outside the outline)
R73  0  [0603]  -118.11,138.43 0 top  (outside the outline)
R74  0  [0603]  -121.92,138.43 0 top  (outside the outline)
R75  0  [0603]  -125.73,138.43 0 top  (outside the outline)
R76  0  [0603]  -129.54,138.43 0 top  (outside the outline)
R77  10k  [0603]  -133.35,138.43 0 top  (outside the outline)
R78  1k  [0603]  -137.16,138.43 0 top  (outside the outline)
R79  1.5k  [0603]  -140.97,138.43 0 top  (outside the outline)
R80  0  [0603]  -144.78,138.43 0 top  (outside the outline)
R81  100k  [0603]  -15.24,142.24 0 top  (outside the outline)
R82  100k  [0603]  -19.05,142.24 0 top  (outside the outline)
R83  200k  [0603]  -22.86,142.24 0 top  (outside the outline)
R84  1k  [0603]  -26.67,142.24 0 top  (outside the outline)
R85  0  [0603]  -30.48,142.24 0 top  (outside the outline)
R86  0  [0603]  -34.29,142.24 0 top  (outside the outline)
R87  0  [0603]  -38.1,142.24 0 top  (outside the outline)
R88  0  [0603]  -41.91,142.24 0 top  (outside the outline)
R89  0  [0603]  -45.72,142.24 0 top  (outside the outline)
R90  100k  [0603]  -49.53,142.24 0 top  (outside the outline)
R91  0  [0603]  -53.34,142.24 0 top  (outside the outline)
R92  1.1k  [0603]  -57.15,142.24 0 top  (outside the outline)
R93  10k  [0603]  -60.96,142.24 0 top  (outside the outline)
R94  100k  [0603]  -64.77,142.24 0 top  (outside the outline)
R95  1.1k  [0603]  -68.58,142.24 0 top  (outside the outline)
R96  10k  [0603]  -72.39,142.24 0 top  (outside the outline)
R97  100k  [0603]  -76.2,142.24 0 top  (outside the outline)
R98  0  [0603]  -80.01,142.24 0 top  (outside the outline)
R99  510  [2010]  -39.37,101.6 0 top  (outside the outline)
R100  10k  [0603]  -83.82,142.24 0 top  (outside the outline)
R101  100k  [0603]  -87.63,142.24 0 top  (outside the outline)
R102  100k  [0603]  -91.44,142.24 0 top  (outside the outline)
R103  100k  [0603]  -95.25,142.24 0 top  (outside the outline)
R104  100k  [0603]  -99.06,142.24 0 top  (outside the outline)
R105  100  [0603]  -102.87,142.24 0 top  (outside the outline)
R106  100k  [0603]  -106.68,142.24 0 top  (outside the outline)
R107  120k  [0603]  -110.49,142.24 0 top  (outside the outline)
R108  0  [0603]  -114.3,142.24 0 top  (outside the outline)
R109  10k  [0603]  -118.11,142.24 0 top  (outside the outline)
R110  10k  [0603]  -121.92,142.24 0 top  (outside the outline)
R111  10k  [0603]  -125.73,142.24 0 top  (outside the outline)
R112  10k  [0603]  -129.54,142.24 0 top  (outside the outline)
R113  10k  [0603]  -133.35,142.24 0 top  (outside the outline)
R114  10k  [0603]  -137.16,142.24 0 top  (outside the outline)
R115  10k  [0603]  -140.97,142.24 0 top  (outside the outline)
R116  4.99k  [0603]  -144.78,142.24 0 top  (outside the outline)
R117  2.7k  [0603]  -15.24,146.05 0 top  (outside the outline)
R118  2.7k  [0603]  -19.05,146.05 0 top  (outside the outline)
R119  10k  [0603]  -22.86,146.05 0 top  (outside the outline)
R120  10k  [0603]  -26.67,146.05 0 top  (outside the outline)
R121  10k  [0603]  -30.48,146.05 0 top  (outside the outline)
R122  10k  [0603]  -34.29,146.05 0 top  (outside the outline)
R123  10k  [0603]  -38.1,146.05 0 top  (outside the outline)
R124  10k  [0603]  -41.91,146.05 0 top  (outside the outline)
R125  10k  [0603]  -45.72,146.05 0 top  (outside the outline)
R126  1M  [0603]  -49.53,146.05 0 top  (outside the outline)
R127  4.7k  [0603]  -53.34,146.05 0 top  (outside the outline)
R128  4.7k  [0603]  -57.15,146.05 0 top  (outside the outline)
R129  9.53k  [0603]  -60.96,146.05 0 top  (outside the outline)
R130  4.7k  [0603]  -64.77,146.05 0 top  (outside the outline)
R131  10k  [0603]  -68.58,146.05 0 top  (outside the outline)
R132  4.7k  [0603]  -72.39,146.05 0 top  (outside the outline)
R133  90.9k  [0603]  -76.2,146.05 0 top  (outside the outline)
R134  4.7k  [0603]  -80.01,146.05 0 top  (outside the outline)
R135  4.7k  [0603]  -83.82,146.05 0 top  (outside the outline)
R136  4.7k  [0603]  -87.63,146.05 0 top  (outside the outline)
R137  4.7k  [0603]  -91.44,146.05 0 top  (outside the outline)
R138  1M  [0603]  -95.25,146.05 0 top  (outside the outline)
R139  1M  [0603]  -99.06,146.05 0 top  (outside the outline)
R140  1M  [0603]  -102.87,146.05 0 top  (outside the outline)
R141  1M  [0603]  -106.68,146.05 0 top  (outside the outline)
R142  25.5k  [0603]  -110.49,146.05 0 top  (outside the outline)
R143  10k  [0603]  -114.3,146.05 0 top  (outside the outline)
R144  10k  [0603]  -118.11,146.05 0 top  (outside the outline)
R145  25.5k  [0603]  -121.92,146.05 0 top  (outside the outline)
R146  10k  [0603]  -125.73,146.05 0 top  (outside the outline)
R147  10k  [0603]  -129.54,146.05 0 top  (outside the outline)
S1  [TACTILE_SWITCH_SMD_4.6X2.8MM]  -116.84,100.33 0 top  (outside the outline)
S2  [TACTILE_SWITCH_SMD_4.6X2.8MM]  -123.19,100.33 0 top  (outside the outline)
S3  [TACTILE_SWITCH_SMD_4.6X2.8MM]  -129.54,100.33 0 top  (outside the outline)
S4  [TACTILE_SWITCH_SMD_4.6X2.8MM]  -135.89,100.33 0 top  (outside the outline)
U1  TPS2553DBVT  [SOT95P280X145-6N]  -111.76,64.77 0 top  (outside the outline)
U2  TLV62084DSGR  [DSG8_0P9X1P6]  -133.35,146.05 0 top  (outside the outline)
U3  LSF0108RKSR  [RKS20_1P1X3P1]  -87.63,85.09 0 top  (outside the outline)
U4  LSF0108RKSR  [RKS20_1P1X3P1]  -93.98,85.09 0 top  (outside the outline)
U5  LSF0108RKSR  [RKS20_1P1X3P1]  -100.33,85.09 0 top  (outside the outline)
U6  LSF0108RKSR  [RKS20_1P1X3P1]  -106.68,85.09 0 top  (outside the outline)
U7  LSF0108RKSR  [RKS20_1P1X3P1]  -113.03,85.09 0 top  (outside the outline)
U8  LSF0108RKSR  [RKS20_1P1X3P1]  -119.38,85.09 0 top  (outside the outline)
U9  LSF0108RKSR  [RKS20_1P1X3P1]  -125.73,85.09 0 top  (outside the outline)
U10  LSF0108RKSR  [RKS20_1P1X3P1]  -132.08,85.09 0 top  (outside the outline)
U11  LSF0108RKSR  [RKS20_1P1X3P1]  -138.43,85.09 0 top  (outside the outline)
U12  LSF0108RKSR  [RKS20_1P1X3P1]  -15.24,93.98 0 top  (outside the outline)
U13  ATMEGA328P_TQFP  [TQFP32-08]  -63.5,52.07 0 top  (outside the outline)
U14  433MHz  [RFM69HCW-XXXS2]  -50.8,33.02 0 top  (outside the outline)
U$1  TPS63021DSJR  [DSJ14_2P85X1P58]  -119.38,93.98 0 top  (outside the outline)
U$2  LFTVS18-1F3_FLIPCHIP  [4-UFBGA]  -59.69,149.86 0 top  (outside the outline)
U$3  LFTVS18-1F3_FLIPCHIP  [4-UFBGA]  -62.23,149.86 0 top  (outside the outline)
U$4  [20-TQFP]  -125.73,93.98 0 top  (outside the outline)
U$5  LFTVS18-1F3_FLIPCHIP  [4-UFBGA]  -64.77,149.86 0 top  (outside the outline)
U$6  TCE0806S-350-2P-T200  [0302_(0806_METRIC)]  -67.31,149.86 0 top  (outside the outline)
U$7  TCE0806S-350-2P-T200  [0302_(0806_METRIC)]  -69.85,149.86 0 top  (outside the outline)
U$8  TCE0806S-350-2P-T200  [0302_(0806_METRIC)]  -72.39,149.86 0 top  (outside the outline)
U$9  TCE0806S-350-2P-T200  [0302_(0806_METRIC)]  -74.93,149.86 0 top  (outside the outline)
U$10  TCE0806S-350-2P-T200  [0302_(0806_METRIC)]  -77.47,149.86 0 top  (outside the outline)
U$11  TCE0806S-350-2P-T200  [0302_(0806_METRIC)]  -80.01,149.86 0 top  (outside the outline)
U$12  TCE0806G-900-2P-T200  [0302_(0806_METRIC)]  -82.55,149.86 0 top  (outside the outline)
U$13  TCE0806G-900-2P-T200  [0302_(0806_METRIC)]  -85.09,149.86 0 top  (outside the outline)
U$14  TCE0806G-900-2P-T200  [0302_(0806_METRIC)]  -87.63,149.86 0 top  (outside the outline)
U$15  TCE0806G-900-2P-T200  [0302_(0806_METRIC)]  -90.17,149.86 0 top  (outside the outline)
U$16  TSM-102-01-L-DV-TR  [4X-.145X.05_SQ]  -24.13,77.47 0 top  (outside the outline)
U$17  M24M02-DRMN6TP  [SOIC8]  -36.83,27.94 0 top  (outside the outline)
U$18  FPF3042UCX  [16-WLCSP]  -22.86,149.86 0 top  (outside the outline)
U$19  FPF2495UCX  [9-WLCSP]  -34.29,149.86 0 top  (outside the outline)
U$20  FPF2495UCX  [9-WLCSP]  -38.1,149.86 0 top  (outside the outline)
U$21  FAN48623UC50X_SWITCHING_REGULATOR  [16-WLCSP]  -25.4,149.86 0 top  (outside the outline)
U$22  SPM4012T-1R0M  [IND_SPM4020]  -85.09,101.6 0 top  (outside the outline)
U$23  SPM4012T-1R0M  [IND_SPM4020]  -92.71,101.6 0 top  (outside the outline)
U$24  ECMF02-2BF3  [5-WLCSP]  -41.91,149.86 0 top  (outside the outline)
U$25  ECMF02-2BF3  [5-WLCSP]  -44.45,149.86 0 top  (outside the outline)
U$26  ECMF02-2BF3  [5-WLCSP]  -46.99,149.86 0 top  (outside the outline)
U$27  IP4856CX25  [25-WLCSP]  -27.94,149.86 0 top  (outside the outline)
U$28  SSM3K56CTL3FCT-ND_NCHAN_MOSFET  [3-XFDFN]  -92.71,149.86 0 top  (outside the outline)
U$29  [0402]  -87.63,105.41 0 top  (outside the outline)
U$30  BK-916-TR_12MM_COINCELL  [12MM_COINCELL]  -134.62,64.77 0 top  (outside the outline)
U$31  [0402]  -93.98,105.41 0 top  (outside the outline)
U$32  [0402]  -100.33,105.41 0 top  (outside the outline)
U$33  [0402]  -106.68,105.41 0 top  (outside the outline)
U$34  [0402]  -113.03,105.41 0 top  (outside the outline)
U$35  [0402]  -119.38,105.41 0 top  (outside the outline)
U$36  [0402]  -125.73,105.41 0 top  (outside the outline)
U$37  [0402]  -132.08,105.41 0 top  (outside the outline)
U$38  [0402]  -138.43,105.41 0 top  (outside the outline)
U$39  [0402]  -144.78,105.41 0 top  (outside the outline)
U$40  [0402]  -17.78,110.49 0 top  (outside the outline)
U$41  [0402]  -24.13,110.49 0 top  (outside the outline)
U$42  [0402]  -30.48,110.49 0 top  (outside the outline)
U$43  [0402]  -36.83,110.49 0 top  (outside the outline)
U$44  [0402]  -43.18,110.49 0 top  (outside the outline)
U$45  92320A282_1/8_SPACER  [1/8"RING]  -69.85,106.68 0 top  (outside the outline)
U$46  92320A282_1/8_SPACER  [1/8"RING]  -73.66,106.68 0 top  (outside the outline)
U$47  92320A282_1/8_SPACER  [1/8"RING]  -77.47,106.68 0 top  (outside the outline)
U$48  92320A282_1/8_SPACER  [1/8"RING]  -81.28,106.68 0 top  (outside the outline)
U$49  ASPIAIG-S8050  [ASPIAIG-S8050]  -62.23,38.1 0 top  (outside the outline)
U$50  [0402]  -49.53,110.49 0 top  (outside the outline)
U$51  BQ25892RTWT  [WQFN-24]  -52.07,95.25 0 top  (outside the outline)
U$52  SSM3K56CTL3FCT-ND_NCHAN_MOSFET  [3-XFDFN]  -95.25,149.86 0 top  (outside the outline)
U$53  SPM4012T-1R0M  [IND_SPM4020]  -100.33,101.6 0 top  (outside the outline)
U$54  PS8203TQFN32GTR-A3  [TQFN32]  -30.48,66.04 0 top  (outside the outline)
U$55  DF40C-100DS-0.4V(51)_100PINCONNECTOR  [100-DF40]  -66.04,93.98 0 top  (outside the outline)
U$56  DF40C-100DS-0.4V(51)_100PINCONNECTOR  [100-DF40]  -86.36,93.98 0 top  (outside the outline)
U$57  TUSB8041  [QFN64-9X9]  -53.34,52.07 0 top  (outside the outline)
U$58  ADP1706ARDZ-1.1-R7  [SOIC8]  -124.46,3.81 0 top  (outside the outline)
U$59  TPS2561DRCT  [10-VSON]  -106.68,101.6 0 top  (outside the outline)
U$60  TPS2561DRCT  [10-VSON]  -111.76,101.6 0 top  (outside the outline)
Y1  16MHz  [CRYSTAL-SMD-5X3.2-4PAD]  -106.68,93.98 0 top  (outside the outline)
Y2  24MHz  [CRYSTAL-SMD-5X3.2-4PAD]  -113.03,93.98 0 top  (outside the outline)

## Library data of the parts
C1-C3 C7 C12 C24-C40 C43-C71 C86-C88 C90 C91 C100-C102 C109-C127 C132 C133 C137 C138 C140-C154 C157-C164 C169-C172 C176 C177 C180-C182 C184 C186 = SparkFun-Capacitors; PROD_ID: CAP-00810
C4 C13-C15 C21 C78-C80 C97 C98 = SparkFun-Capacitors; PROD_ID: CAP-08402
C5 C82 = SparkFun-Capacitors; PROD_ID: CAP-08913
C6 = SparkFun-Capacitors; PROD_ID: CAP-07890
C8-C10 C17 C23 C72 C76 C89 C92-C94 C99 C105-C108 C128 C129 C139 C155 C156 = SparkFun-Capacitors; PROD_ID: CAP-11015
C11 C18-C20 C83 C103 C104 C136 = SparkFun-Capacitors; PROD_ID: CAP-00868
C16 C73 C74 = SparkFun-Capacitors; PROD_ID: CAP-07888
C22 = SparkFun-Capacitors; PROD_ID: CAP-13339
C41 C42 = SparkFun-Capacitors; PROD_ID: CAP-07822
C75 = SparkFun-Capacitors; PROD_ID: CAP-08362
C77 = SparkFun-Capacitors; PROD_ID: CAP-07883
C84 C85 = SparkFun-Capacitors; PROD_ID: CAP-11661
C95 = SparkFun-Capacitors; PROD_ID: CAP-08605
C96 C173 C175 = SparkFun-Capacitors; PROD_ID: CAP-08280
C130 C131 = SparkFun-Capacitors; PROD_ID: CAP-07876
C134 C135 = SparkFun-Capacitors; PROD_ID: CAP-08267
C165-C168 = SparkFun-Capacitors; PROD_ID: CAP-07886
C174 = SparkFun-Capacitors; PROD_ID: CAP-00867
C178 C179 C183 C185 = SparkFun-Capacitors; PROD_ID: CAP-08439
CF1 = murata-filter; MPN: NFM21CC102R1H3D; OC_FARNELL: 1828795; OC_NEWARK: 84R0165
D1-D3 = SparkFun-DiscreteSemi; PROD_ID: DIO-09886
D4-D6 = SparkFun-DiscreteSemi; PROD_ID: DIO-10955
D7-D10 = SparkFun-LED; PROD_ID: DIO-00821
D11 = SparkFun-LED
F1 F2 = DigiKey; MANUFACTURER_PART_NUMBER: 043503.5KRHF; VENDOR: Littelfuse Inc
FB1-FB10 = SparkFun-Coils; PROD_ID: NDUC-07859
H1-H4 = holes
IC1 = ftdichip-3
J1 = SparkFun-Connectors; PROD_ID: CONN-08106; SF_ID: PRT-12748
J2 J8 = SparkFun-Connectors
J3 = SparkFun-Connectors; PROD_ID: CONN-11752
J4 = SparkFun-Connectors; PROD_ID: CONN-11566
J5 = Wurth_Elektronik_Electromechanic_Input-Output_Connectors_rev16b
J6 J7 = Joule Expansion Board; MANUFACTURER_PART_NUMBER: SSM120SDV; VENDOR: Samtec Inc
J9 = connector; DIGIKEY: HR1964CT-ND
J10 = SparkFun-Connectors; PROD_ID: CONN-11290
K2-K5 U$2-U$53 U$55-U$60 = Joule Expansion Board
P1 = 1-2295018-2; AVAILABILITY: Good; DESCRIPTION: Conn USB Type C RCP 12 POS Solder RA SMD 12 Terminal 1 Port T/R; MF: TE Connectivity / AMP; MP: 1-2295018-2; PACKAGE: None; PRICE: 1.83 USD
PAD1-PAD4 = wirepad
Q1 Q2 = SparkFun-DiscreteSemi; PROD_ID: TRANS-13337
Q3 Q4 = SparkFun-DiscreteSemi; PROD_ID: TRANS-00830
R1 R4 R5 R10 R18 R19 R21 R68-R76 R80 R85-R89 R91 R98 R108 = SparkFun-Resistors; PROD_ID: RES-08609
R2 = SparkFun-Resistors; PROD_ID: RES-09119
R3 R12-R15 R17 R64-R67 R77 R93 R96 R100 R109-R115 R119-R125 R131 R143 R144 R146 R147 = SparkFun-Resistors; PROD_ID: RES-00824
R6 R7 R9 R11 R20 R25-R28 R31-R38 R48-R53 R58-R60 R81 R82 R90 R94 R97 R101-R104 R106 R107 R133 = SparkFun-Resistors; PROD_ID: RES-07828
R8 = SparkFun-Resistors; PROD_ID: RES-07823
R16 R24 R29 R30 R39 R54-R57 R83 = SparkFun-Resistors; PROD_ID: RES-09385
R22 R23 R117 R118 = SparkFun-Resistors; PROD_ID: RES-11227
R40-R43 R79 = SparkFun-Resistors; PROD_ID: RES-08306
R44-R47 R99 = SparkFun-Resistors; PROD_ID: RES-08717
R61 R105 = SparkFun-Resistors; PROD_ID: RES-12438
R62 R63 = SparkFun-Resistors; PROD_ID: RES-07851
R78 R84 R92 R95 = SparkFun-Resistors; PROD_ID: RES-07856
R116 R127 R128 R130 R132 R134-R137 = SparkFun-Resistors; PROD_ID: RES-07857
R126 R138-R141 = SparkFun-Resistors; PROD_ID: RES-07868
R129 = SparkFun-Resistors; PROD_ID: RES-12534
R142 R145 = SparkFun-Resistors; PROD_ID: RES-12186
S1-S4 = SparkFun-Switches; PROD_ID: SWCH-13065
U1 = Texas Instruments_By_element14_Batch_1; MPN: TPS2553DBVT; OC_FARNELL: 1694425; OC_NEWARK: 40P3870; PACKAGE: SOT-23-6; SUPPLIER: Texas Instruments
U2 = Joule Expansion Board; MANUFACTURER_PART_NUMBER: tlv62084dsgr; VENDOR: Texas Instruments
U3-U12 = Joule Expansion Board; MANUFACTURER_PART_NUMBER: lsf0108rksr; VENDOR: Texas Instruments
U13 = SparkFun-IC-Microcontroller; PROD_ID: IC-09069
U14 = SparkFun-RF; PROD_ID: IC-12053
U$1 = DigiKey; MANUFACTURER_PART_NUMBER: TPS63021DSJR; VENDOR: Texas Instruments
U$54 = temp
Y1 = SparkFun-Clocks; PROD_ID: XTAL-08218; SF_ID: COM-00094
Y2 = SparkFun-Clocks; PROD_ID: XTAL-08298; SF_ID: COM-08581